# Altium PCB Control_Board.PcbDoc
Units mm, origin at the board's own origin, x right, y up, seen from the top; angles counter-clockwise.
Board outline 45 x 50 mm, 2 copper layers (Top Layer, Bottom Layer); 65 components, 68 nets, 264 pads, 144 vias.
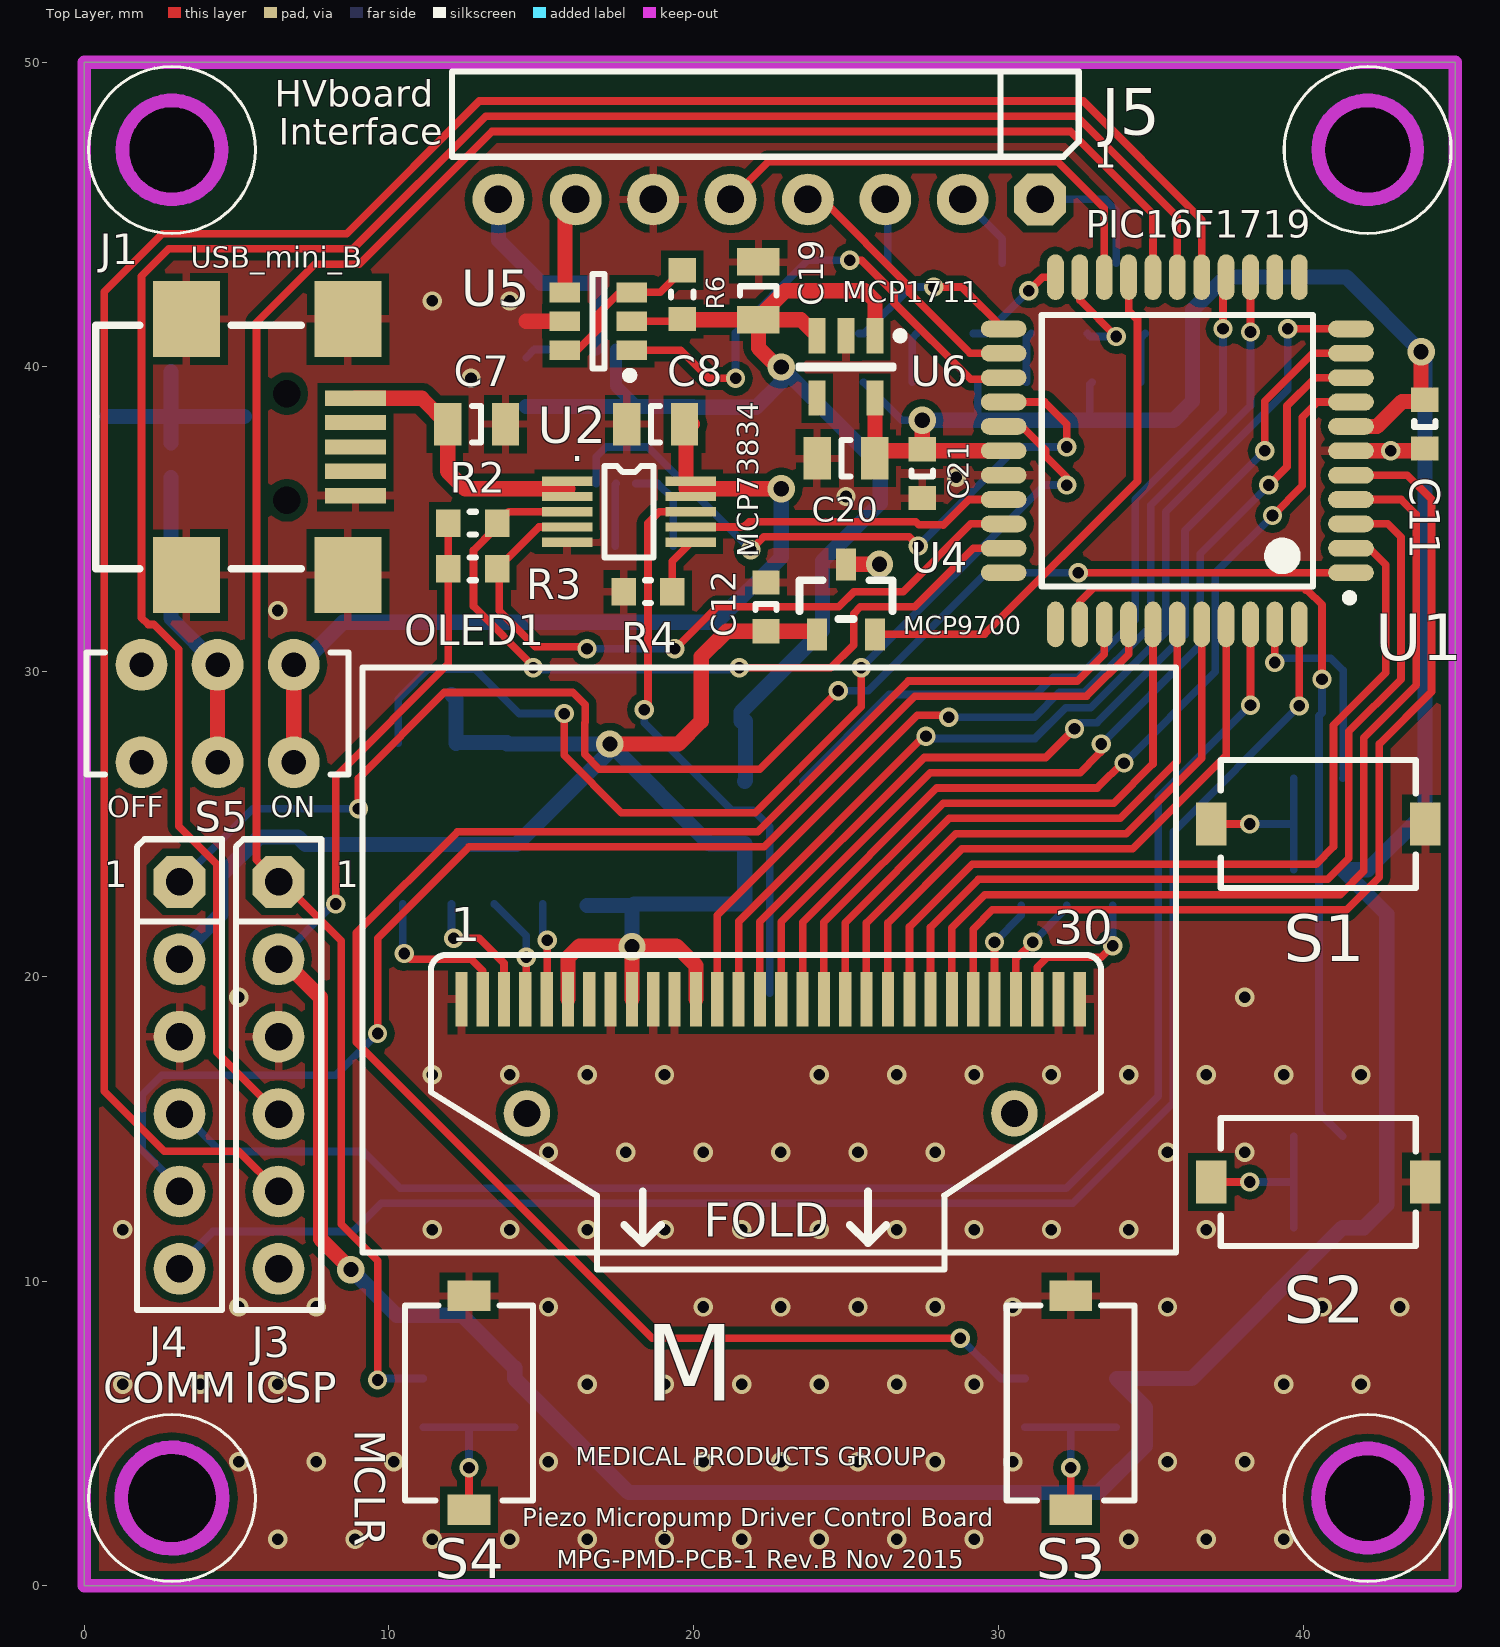
[diagram p0: Top Layer view]
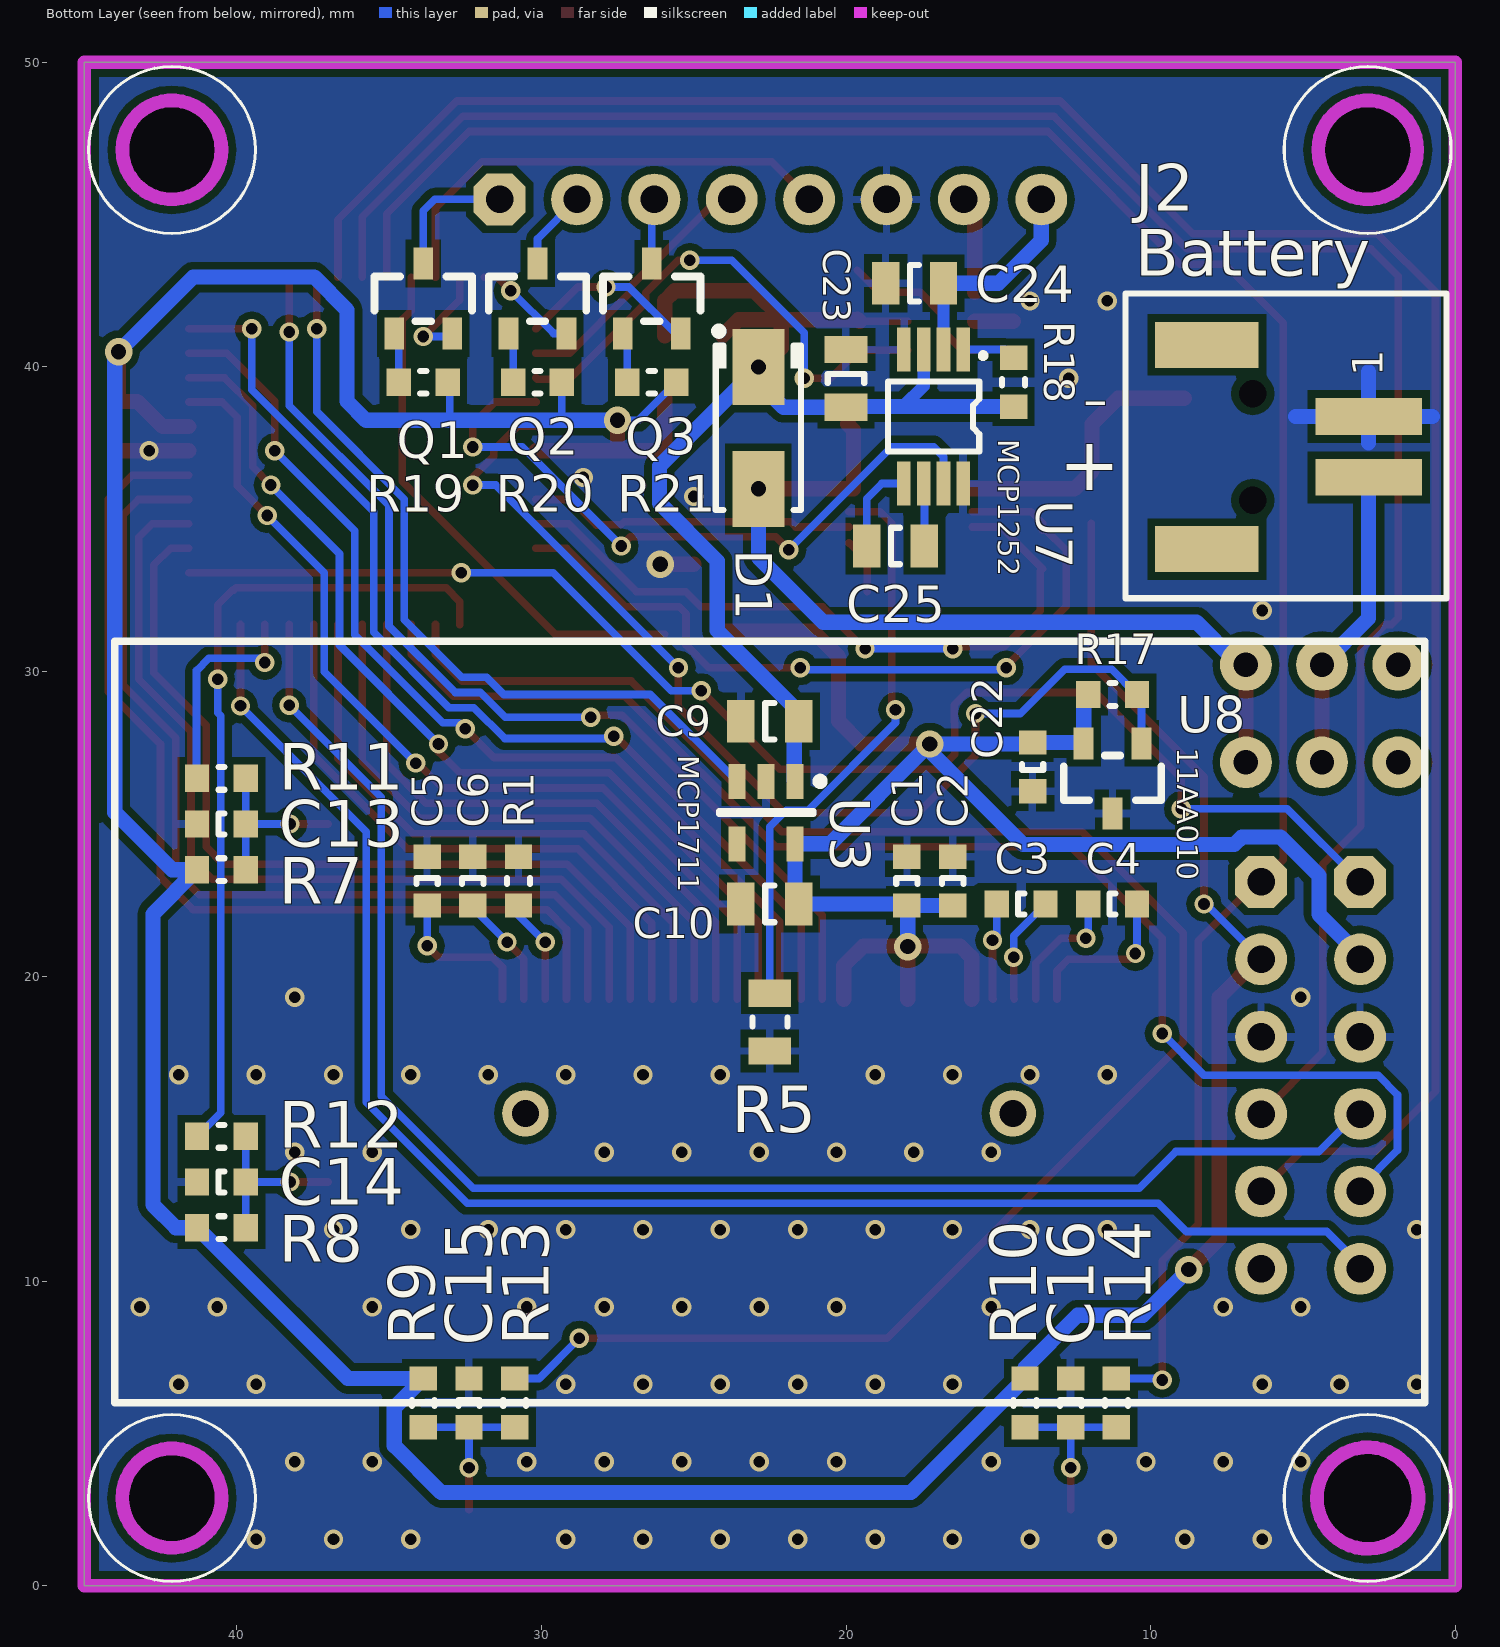
[diagram p1: Bottom Layer view, seen from below]
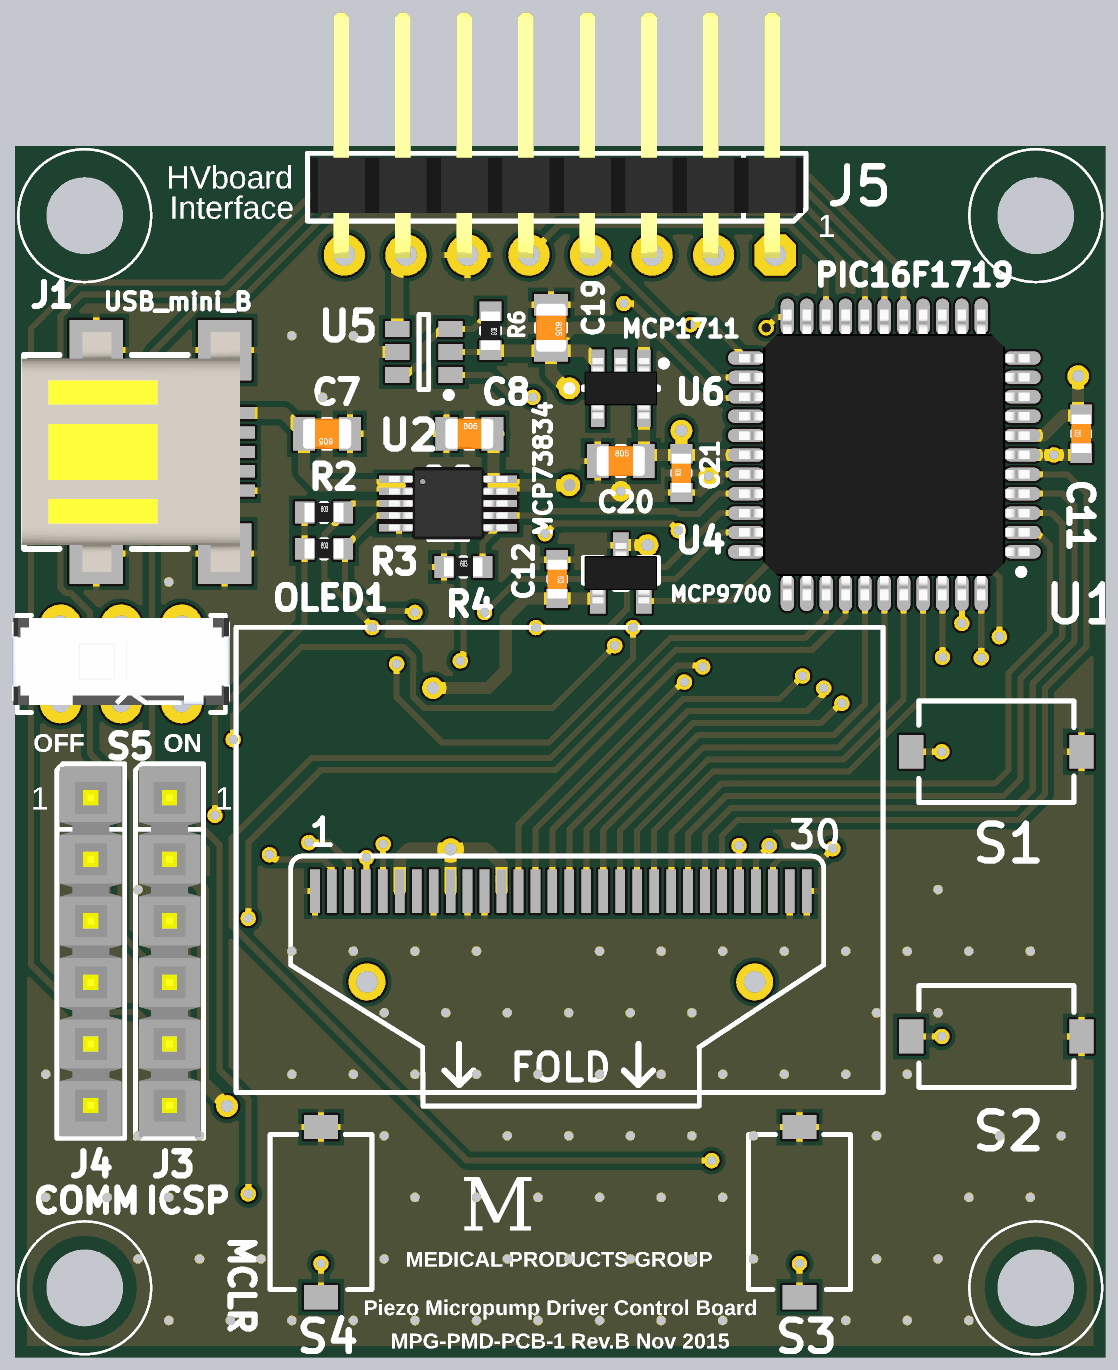
[diagram p2: 3D render of the assembled board from above, using the file's embedded part models]
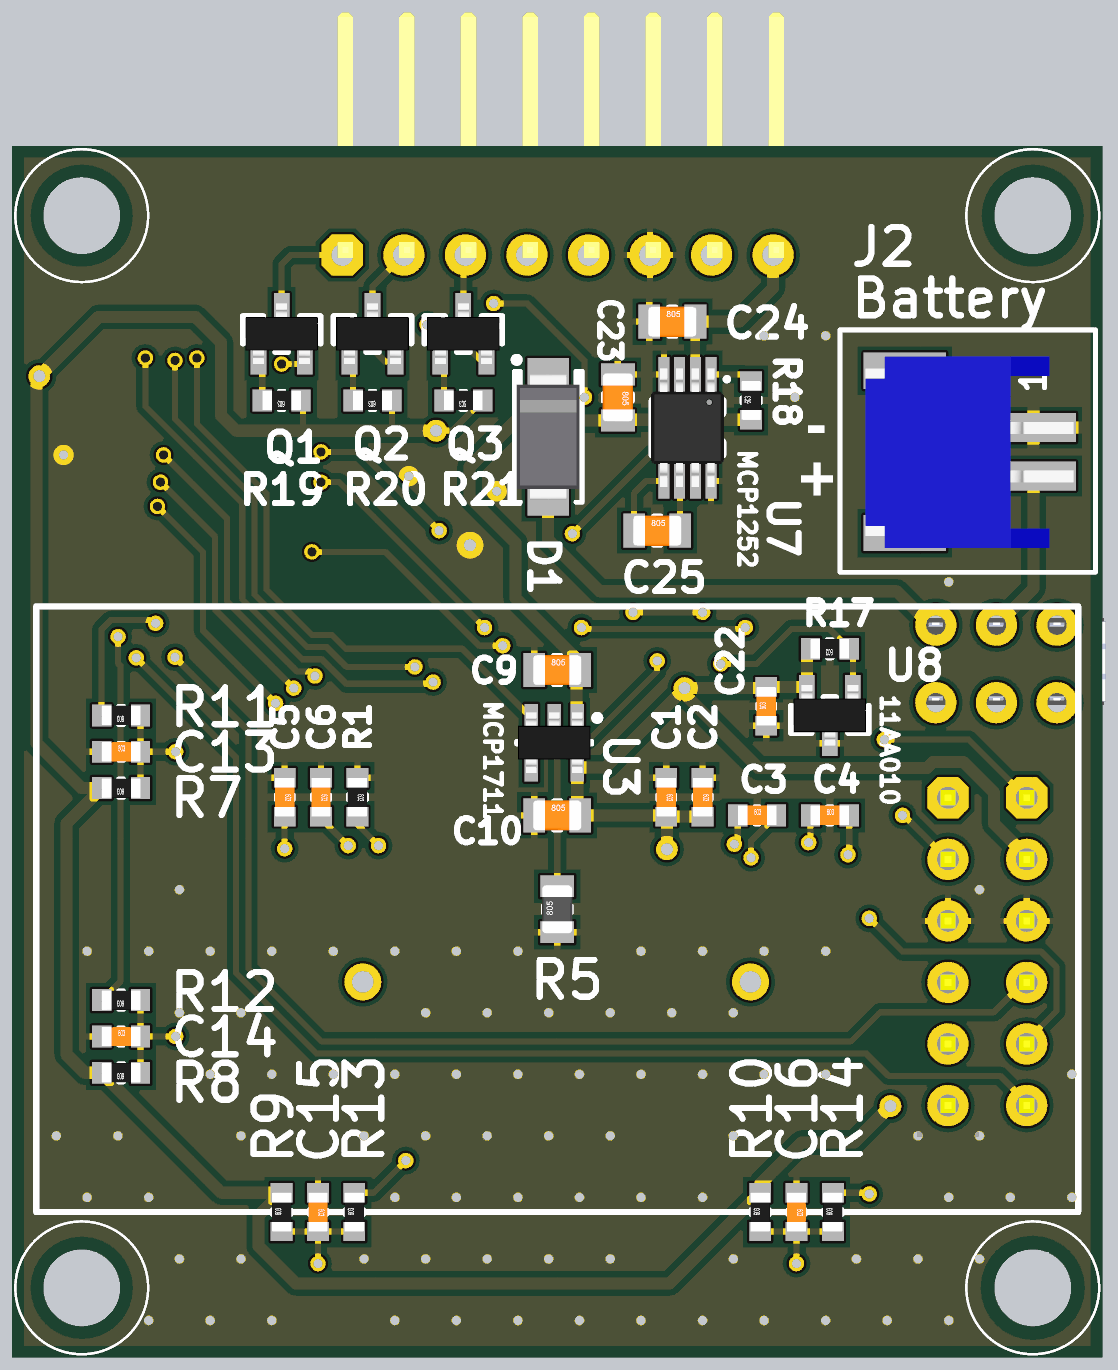
[diagram p3: 3D render of the assembled board from below, using the file's embedded part models]

## Layer stack, top to bottom
Top Solder: solder mask 0.0102, Solder Resist, Dk 3.5
Top Layer: signal copper 0.0356
Dielectric1: dielectric 0.32, FR-4, Dk 4.8
Bottom Layer: signal copper 0.0356
Bottom Solder: solder mask 0.0102, Solder Resist, Dk 3.5

## Board outline
0,0 0,50 45,50 45,0

## Design rules (kind name [scope] priority, off if disabled: settings)
Clearance [All] p1: gap=0.25 except(0.15: SMDPad-SMDPad)
FabricationTestPointUsage TestPointUsage [All] p1: valid=0 allowmultiple=FALSE
FabricationTestpoint Testpoint [All] p1: side=3 testpointundercomponent=TRUE minsize=1.016 maxsize=2.54 preferedsize=1.524 minholesize=0 maxholesize=1.016 preferedholesize=0.813 testpointgrid=0.025 allowsidetop=TRUE allowsidebottom=TRUE usegrid=TRUE gridtolerance=0
PolygonConnect PolygonConnect_3 [IsVia] p1: connectstyle=Direct reliefconductorwidth=0.254 reliefentries=4 polygonreliefangle="90 Angle" airgapwidth=0.254
PolygonConnect [All] p2: connectstyle=Relief reliefconductorwidth=0.254 reliefentries=4 polygonreliefangle="90 Angle" airgapwidth=0.254
RoomDefinition Control_Board [InComponentClass('Control_Board')] p1: confinementstyle=ConfineIn formatcopy=TRUE lockcomponents=FALSE outline 44.263,40.568 83.375,40.568 83.375,75.568 44.263,75.568
RoutingVias RoutingVias_Power [(InNet('+2.8V') OR InNet('+3.7V') OR InNet('+5.0V') OR InNet('VBAT') OR InNet('VDD') OR InNet('VUSB') OR InNet('GND'))] p1: holewidth=0.5 width=0.9 viastyle="Through Hole" minholewidth=0.5 minwidth=0.9 maxholewidth=0.5 maxwidth=0.9
RoutingVias [All] p2: holewidth=0.381 width=0.635 viastyle="Through Hole" minholewidth=0.381 minwidth=0.635 maxholewidth=0.381 maxwidth=0.635
SilkToSilkClearance [All] p1: silktosilkclearance=0.01
SilkToSolderMaskClearance SilkscreenOverComponentPads [IsPad] p1: minsilkscreentomaskgap=0.01 clearancetoexposedcopper=TRUE
SolderMaskExpansion [All] p1: expansion=0.102
Width Width_Power [(InNet('+2.8V') OR InNet('+3.7V') OR InNet('+5.0V') OR InNet('VBAT') OR InNet('VDD') OR InNet('VUSB') OR InNet('GND') OR InNet('+3.3V') OR InNet('+3.3V_MCU'))] p1: maxlimit=0.5 minlimit=0.25 preferedwidth=0.5
Width [All] p2: maxlimit=0.25 minlimit=0.25 preferedwidth=0.25
26 further rules are at their usual default settings.

## Components (designator, comment, footprint, x,y, rotation, side; value= is the part's Value field where it differs from the comment)
C1 "Capacitor NP" CAP_C_0603 18,23.125 r270 bottom
C2 "Capacitor NP" CAP_C_0603 16.5,23.125 r270 bottom
C3 "Capacitor NP" CAP_C_0603 14.25,22.375 r180 bottom
C4 "Capacitor NP" CAP_C_0603 11.25,22.375 r180 bottom
C5 "Capacitor NP" CAP_C_0603 33.75,23.125 r270 bottom
C6 "Capacitor NP" CAP_C_0603 32.25,23.125 r270 bottom
C7 "Capacitor NP" CAP_C_0805 12.875,38.125 r180 top
C8 "Capacitor NP" CAP_C_0805 18.75,38.125 r0 top
C9 "Capacitor NP" CAP_C_0805 22.5,28.375 r180 bottom
C10 "Capacitor NP" CAP_C_0805 22.5,22.375 r180 bottom
C11 "Capacitor NP" CAP_C_0603 44,38.125 r90 top
C12 "Capacitor NP" CAP_C_0603 22.375,32.125 r270 top
C13 "Capacitor NP" CAP_C_0603 40.5,25 r180 bottom
C14 "Capacitor NP" CAP_C_0603 40.5,13.25 r180 bottom
C15 "Capacitor NP" CAP_C_0603 32.375,6 r270 bottom
C16 "Capacitor NP" CAP_C_0603 12.625,6 r270 bottom
C19 "Capacitor NP" CAP_C_0805 22.125,42.5 r270 top
C20 "Capacitor NP" CAP_C_0805 25,37 r0 top
C21 "Capacitor NP" CAP_C_0603 27.5,36.5 r90 top
C22 "Capacitor NP" CAP_C_0603 13.875,26.875 r90 bottom
C23 "Capacitor NP" CAP_C_0805 20,39.625 r270 bottom
C24 "Capacitor NP" CAP_C_0805 17.75,42.75 r180 bottom
C25 "Capacitor NP" CAP_C_0805 18.375,34.125 r180 bottom
D1 "Diode Schottky" DO-214AC_SMA 22.875,38 r90 bottom
J1 "USB_mini_B" CON_USB-B_Mini_SMD_RA_HIR_UX60-MB-5ST 6.125,37.375 r270 top
J2 "Battery" HDR_M_2_1X2_SMD_RA 5.5,37.375 r270 bottom
J3 "ICSP" HDR_M_2.54_1x6 6.375,16.75 r270 top
J4 "COMM" HDR_M_2.54_1x6 3.125,16.75 r270 top
J5 "HVboard_Interface" HDR_M_2.54_1x8_RA 22.48,45.5 r180 top
OLED1 "OLED_2864HSWEG01" OLED_2864HSWEG01 22.525,19.25 r0 top
Q1 "Transistor NPN BEC" SOT-23-3 33.875,42.25 r180 bottom
Q2 "Transistor NPN BEC" SOT-23-3 30.125,42.25 r180 bottom
Q3 "Transistor NPN BEC" SOT-23-3 26.375,42.25 r180 bottom
R1 "Resistor" RES_C_0603 30.75,23.125 r270 bottom
R2 "Resistor" RES_C_0603 12.75,34.875 r0 top
R3 "Resistor" RES_C_0603 12.75,33.375 r0 top
R4 "Resistor" RES_C_0603 18.5,32.625 r0 top
R5 "10k" RES_C_0805 22.5,18.5 r90 bottom
R6 "Resistor" RES_C_0603 19.625,42.375 r270 top
R7 "Resistor" RES_C_0603 40.5,23.5 r0 bottom
R8 "Resistor" RES_C_0603 40.5,11.75 r0 bottom
R9 "Resistor" RES_C_0603 33.875,6 r90 bottom
R10 "Resistor" RES_C_0603 14.125,6 r90 bottom
R11 "Resistor" RES_C_0603 40.5,26.5 r0 bottom
R12 "Resistor" RES_C_0603 40.5,14.75 r0 bottom
R13 "Resistor" RES_C_0603 30.875,6 r90 bottom
R14 "Resistor" RES_C_0603 11.125,6 r90 bottom
R17 "Resistor" RES_C_0603 11.25,29.25 r0 bottom
R18 "Resistor" RES_C_0603 14.5,39.5 r90 bottom
R19 "Resistor" RES_C_0603 33.875,39.5 r0 bottom
R20 "Resistor" RES_C_0603 30.125,39.5 r0 bottom
R21 "Resistor" RES_C_0603 26.375,39.5 r0 bottom
S1 "Switch 2 Pin" SW_TACT_SMD_CK_KSR231GLFS 40.5,25 r90 top
S2 "Switch 2 Pin" SW_TACT_SMD_CK_KSR231GLFS 40.5,13.25 r90 top
S3 "Switch 2 Pin" SW_TACT_SMD_CK_KSR231GLFS 32.375,6 r180 top
S4 "MCLR" SW_TACT_SMD_CK_KSR231GLFS 12.625,6 r180 top
S5 "Switch 6 Pin SPDT" SW_SLIDE_TH_ESW_EG1271 4.375,28.625 r0 top
U1 "PIC16F1719" TQFP-44_10x10 35.875,37.25 r180 top
U2 "MCP73834" MSOP-10 17.875,35.25 r0 top
U3 "MCP1711" SOT-23-5 22.625,25.375 r0 bottom
U4 "MCP9700" SOT-23-3 25,32.375 r0 top
U5 "MOSFET N/P-CH 30V 26TSOT" TSOT26 16.875,41.5 r90 top
U6 "MCP1711" SOT-23-5 25,40 r180 top
U7 "MCP1252" MSOP-8 17.125,38.375 r270 bottom
U8 "11AA010" SOT-23-3 11.25,26.5 r0 bottom

## Footprints (in the part's own frame and the unit in brackets; to place one, negate y for a bottom-side part, rotate by r counter-clockwise, add the part's x,y. Pads: shape width x height; smd on the part's side, far side on the other; paste and mask are expansions set on the pad)
CAP_C_0603 [mm] "Chip Capacitor, 2-Leads, Body 1.6x0.8mm, IPC Medium Density"
  rect 0.8x0.9 smd: 1(-0.8,0) 2(0.8,0)
  silkscreen extent -0.1,-0.35 0.1,0.35, body extent -0.8,-0.4 0.8,0.4, height 0.3
CAP_C_0805 [mm] "Chip Capacitor, 2-Leads, Body 2.0x1.3mm, IPC Medium Density"
  rect 0.9x1.4 smd: 1(-0.95,0) 2(0.95,0)
  silkscreen extent -0.15,-0.6 0.15,0.6, body extent -1,-0.62 1,0.63, height 0.78
CON_USB-B_Mini_SMD_RA_HIR_UX60-MB-5ST [mm] "USB Mini B Metal Shield SMT R/A Type With Positioning Post"
  rect 2.5x2.2 smd: 0(-4.2,2.525) 0(-4.2,-2.775) 0(4.2,2.525) 0(4.2,-2.775)
  rect 0.5x2 smd: 1(-1.6,2.775) 2(-0.8,2.775) 3(0,2.775) 4(0.8,2.775) 5(1.6,2.775)
  round 0 hole 0.9 unplated: MH(-1.75,0.525) MH(1.75,0.525)
  silkscreen extent -4,-5.75 4,1, body extent -4.95,-5.85 4.95,3.15, height 4.6
DO-214AC_SMA [mm] "Molded Diode, 2-Leads, Body 5.0x2.7mm, IPC Medium Density"
  rect 2.5x1.7 smd: 1(-2,0) 2(2,0)
  silkscreen extent -2.7,-1.5 3.3,1.5, body extent -2.6,-1.3 2.6,1.3, height 2.4
HDR_M_2.54_1x6 [mm] "Header Male Vertical 6 Way 2.54mm Pitch"
  oct 1.7x1.7 hole 0.9: 1(-6.35,0)
  round 1.7 hole 0.9: 2(-3.81,0) 3(-1.27,0) 4(1.27,0) 5(3.81,0) 6(6.35,0)
  silkscreen extent -7.75,-1.4 7.7,1.4, body extent -7.62,-1.27 7.62,1.27, height 8.38
HDR_M_2.54_1x8_RA [mm] "Header Male Right Angle 8 Way 2.54mm Pitch"
  oct 1.7x1.7 hole 0.9: 1(-8.89,0)
  round 1.7 hole 0.9: 2(-6.35,0) 3(-3.81,0) 4(-1.27,0) 5(1.27,0) 6(3.81,0) 7(6.35,0) 8(8.89,0)
  silkscreen extent -10.16,-4.2 10.41,-1.4, body extent -10.03,-10.02 10.29,0.11, height 3.86
HDR_M_2_1X2_SMD_RA [mm] "CONN HEADER 2POS 2MM GOLD DIP"
  rect 1.2x3.5 smd: 1(-1,2.654)
  rrect0% 1.2x3.5 smd: 2(1,2.654)
  rect 1.5x3.4 smd: ""(-3.35,-2.654) ""(3.35,-2.654)
  silkscreen extent -5.04,-5.33 4.96,5.21, body extent -3.94,-4.28 3.96,4.32, height 5.3
MSOP-8 [mm] "MSOP, 8-Leads, Body 4.9.0x3.0mm (max), Pitch 0.65mm, IPC Medium Density"
  rect 1.45x0.45 smd: 1(-2.2,0.975) 2(-2.2,0.325) 3(-2.2,-0.325) 4(-2.2,-0.975) 5(2.2,-0.975) 6(2.2,-0.325) 7(2.2,0.325) 8(2.2,0.975)
  silkscreen extent -2.05,-1.5 1.15,1.67, body extent -2.45,-1.5 2.45,1.5, height 1.15
MSOP-10 [mm] "MSSOP, 10-Leads, Body 3.0x3.0mm (max), Pitch 0.50mm, IPC Medium Density"
  rect 1.65x0.3 smd: 1(-2.025,1) 2(-2.025,0.5) 3(-2.025,0) 4(-2.025,-0.5) 5(-2.025,-1) 6(2.025,-1) 7(2.025,-0.5) 8(2.025,0) 9(2.025,0.5) 10(2.025,1)
  silkscreen extent -0.8,-1.5 0.8,1.5, body extent -2.45,-1.5 2.45,1.5, height 1.15
OLED_2864HSWEG01 [mm]
  rect 0.4x1.8 smd: 1(-10.15,0) 2(-9.45,0) 3(-8.75,0) 4(-8.05,0) 5(-7.35,0) 6(-6.65,0) 7(-5.95,0) 8(-5.25,0) 9(-4.55,0) 10(-3.85,0) 11(-3.15,0) 12(-2.45,0) 13(-1.75,0) 14(-1.05,0) 15(-0.35,0) 16(0.35,0) 17(1.05,0) 18(1.75,0) 19(2.45,0) 20(3.15,0) 21(3.85,0) 22(4.56,0) 23(5.25,0) 24(5.95,0) 25(6.65,0) 26(7.35,0) 27(8.05,0) 28(8.75,0) 29(9.45,0) 30(10.15,0)
  round 1.524 hole 0.889: MH(-8,-3.75) MH(8,-3.75)
  silkscreen extent -13.4,-8.88 13.3,10.89, body extent -13.45,-8.25 13.34,10.92, height 1.52
RES_C_0603 [mm] "Chip Resistor, 2-Leads, Body 1.6x0.8mm, IPC Medium Density"
  rect 0.8x0.9 smd: 1(-0.8,0) 2(0.8,0)
  silkscreen extent -0.1,-0.38 0.1,0.38, body extent -0.8,-0.4 0.8,0.4, height 0.3
RES_C_0805 [mm] "Chip Resistor, 2-Leads, Body 2.0x1.3mm, IPC Medium Density"
  rect 0.9x1.4 smd: 1(-0.95,0) 2(0.95,0)
  silkscreen extent -0.15,-0.58 0.15,0.58, body extent -1,-0.63 1,0.63, height 0.78
SOT-23-3 [mm]
  rect 0.65x1.05 smd: 1(-0.95,-1.15) 2(0.95,-1.15) 3(0,1.15)
  silkscreen extent -1.6,-0.75 1.6,0.72, body extent -1.5,-1.25 1.5,1.25, height 1.09
SOT-23-5 [mm] "SOT-23-5"
  rect 0.55x1.15 smd: 1(-0.95,-1.025) 2(0,-1.025) 3(0.95,-1.025) 4(0.95,1.025) 5(-0.95,1.025)
  silkscreen extent -1.9,-1.15 1.55,0.05, body extent -1.5,-1.25 1.5,1.25, height 1.08
SW_SLIDE_TH_ESW_EG1271 [mm] "E-Switch EG1271"
  round 1.7 hole 0.8: 1(-2.5,1.6) 2(0,1.6) 3(2.5,1.6) 4(-2.5,-1.6) 5(0,-1.6) 6(2.5,-1.6)
  silkscreen extent -4.3,-2 4.3,2, body extent -4.5,-1.75 4.5,1.9, height 5.5
SW_TACT_SMD_CK_KSR231GLFS [mm]
  rect 1.4x1 smd: 1(0,-3.51) 2(0,3.51)
  silkscreen extent -2.1,-3.2 2.1,3.2, body extent -1.91,-3.8 1.92,3.81, height 4.5
TQFP-44_10x10 [mm] "TQFP, 44-Leads, Body 10x10mm (max), Pitch 0.80mm, IPC Medium Density"
  oval 1.5x0.55 smd: 1(-5.7,4) 2(-5.7,3.2) 3(-5.7,2.4) 4(-5.7,1.6) 5(-5.7,0.8) 6(-5.7,0) 7(-5.7,-0.8) 8(-5.7,-1.6) 9(-5.7,-2.4) 10(-5.7,-3.2) 11(-5.7,-4) 23(5.7,-4) 24(5.7,-3.2) 25(5.7,-2.4) 26(5.7,-1.6) 27(5.7,-0.8) 28(5.7,0) 29(5.7,0.8) 30(5.7,1.6) 31(5.7,2.4) 32(5.7,3.2) 33(5.7,4)
  oval 0.55x1.5 smd: 12(-4,-5.7) 13(-3.2,-5.7) 14(-2.4,-5.7) 15(-1.6,-5.7) 16(-0.8,-5.7) 17(0,-5.7) 18(0.8,-5.7) 19(1.6,-5.7) 20(2.4,-5.7) 21(3.2,-5.7) 22(4,-5.7) 34(4,5.7) 35(3.2,5.7) 36(2.4,5.7) 37(1.6,5.7) 38(0.8,5.7) 39(0,5.7) 40(-0.8,5.7) 41(-1.6,5.7) 42(-2.4,5.7) 43(-3.2,5.7) 44(-4,5.7)
  silkscreen extent -5.78,-4.45 4.45,4.95, body extent -6,-6 6,6, height 1.05
TSOT26 [mm] "TSOT26 - 6PIN"
  rect 0.65x1 smd: 1(-0.95,-1.1) 2(0,-1.1) 3(0.95,-1.1) 4(0.95,1.1) 5(0,1.1) 6(-0.95,1.1)
  silkscreen extent -1.9,-1.15 1.55,0.2

## Part data
C1 C2 C3 C4: library part CAP0517, "Capacitor"
C5 C6: library part CAP0597, "Capacitor"
C7 C8: library part CAP0419, "Capacitor"
C9 C10 C19 C20 C25: library part CAP1211, "Capacitor"
C11 C12 C13 C14 C15 C16 C21 C22: library part CAP0011, "Capacitor"
C23 C24: library part CAP1148, "Capacitor"
D1: library part DIODE0128
J1: library part CON0276, "Connector USB"
J2: library part CON1434
J3 J4: library part CON1106
J5: library part CON1290
OLED1: library part LCD0034
Q1 Q2 Q3: library part TRA0039, "Transistor Bipolar"
R1: library part RSMT0758
R2 R3: library part RES1130
R4: library part RSMT0138
R5: library part RES1425
R6: library part RSMT1115
R7 R8 R9 R10: library part RSMT0139
R11 R12 R13 R14: library part RSMT0518
R17 R19 R20 R21: library part RSMT0309
R18: library part RES1066
S1 S2 S3 S4: library part SWITCH1040, "Switch"
S5: library part SWITCH0051, "Switch, Slide, SPDT, TH"
U1: library part MIC6241, "PIC16F"
U2: library part MIC3178, "MCP738XX"
U3 U6: library part MIC6434, "LDO MCP1711"
U4: library part MIC0740, "MCP97XX"
U5: library part "MOSFET N/P-CH 30V"
U7: library part MIC6473, "Low-Noise, Positive-Regulated Charge Pump"
U8: "IC EEPROM 1KBIT 100KHZ SOT23-3"

## Free pads (board coordinates)
  round 0.762 hole 3.175 unplated: 0(2.875,2.875) 0(2.875,47.125) 1(42.125,2.875) 1(42.125,47.125)

## Via types
v1: diameter 0.635, hole 0.381, Top Layer to Bottom Layer, tented both sides, 84 vias
v2: diameter 0.635, hole 0.381, Top Layer to Bottom Layer, 52 vias
v3: diameter 0.9, hole 0.5, Top Layer to Bottom Layer, 8 vias

## Nets (pads, with @x,y where several pads share a name; then routed paths per layer and width w, separated by ;. In a path a pad name is that pad's centre, name@x,y a point inside that pad or via, vN(x,y) a via of type N, cw(c..) or ccw(c..) an arc to the next point about the centre after c; other vN are vias at no path point)
+3.3V: C1.2 C2.2 C10.2 C12.2 C22.2 J4.2 OLED1.6 OLED1.9 OLED1.12 R17.2 U3.5 U4.1 U8.2 | length 57.6
  Top Layer w0.25: U4.1@24.025,31.325 U4.1@24.05,31.35
  Top Layer w0.5: OLED1.6 15.875,20.625 16.25,21 19.432,21 20.075,20.357 OLED1.12 ; v3(17.25,27.625) 19.5,27.625 20.25,28.375 20.25,30.5 21.075,31.325 C12.2 U4.1@24.025,31.325 ; OLED1.9 v3(17.975,20.975)
  Bottom Layer w0.5: J4.2@3.125,20.685 4.475,22.035 4.475,23.307 5.743,24.575 7.007,24.575 7.257,24.325 14.182,24.325 17.25,27.393 v3(17.25,27.625) ; R17.2 12.2,29.1 U8.2 12.225,27.675 C22.2 ; C22.2@13.875,27.625 v3(17.25,27.625) ; C2.2 C1.2 ; v3(17.975,20.975) 17.975,22.3 C1.2 ; v3(17.25,27.625) 20.525,24.35 U3.5 21.675,22.4 21.7,22.375 C10.2 18.05,22.375 C1.2
+3.3V_MCU: C11.2 C20.2 C21.2 J3.2 R2.1 R3.1 R7.2 R8.2 R9.2 R10.2 R19.1 R20.1 R21.1 U1.7 U1.28 U6.5 | length 139.7
  Top Layer w0.25: v2(8.25,22.375) 8.25,26.555 11.95,30.255 R3.1 R2.1 ; C21.2@27.5,37.25 C21.2 ; C11.2@43.947,38.872 C11.2
  Top Layer w0.5: J3.2@6.438,20.622 7.75,19.31 7.75,11.375 v3(8.75,10.375) ; U6.5 C20.2 26.2,37.25 27.5,37.25 U1.28 ; C21.2@27.5,37.3 v3(27.5,38.25) ; U1.7 42.431,38.05 43.253,38.872 C11.2@43.875,38.872 ; v3(43.875,40.5) 43.875,38.944 C11.2@43.947,38.872
  Bottom Layer w0.25: J3.2 v2@8.19,22.375 ; J3.2@6.375,20.685 J3.2@6.44,20.685 ; R21.1 26.825,38.25 v3(27.5,38.25) ; 29.25,38.25 29.325,38.325 R20.1 ; 33,38.25 33,39.425 R19.1
  Bottom Layer w0.5: v2@8.19,22.375 v2(8.25,22.375) ; v3(8.75,10.375) 10.25,8.875 12.4,8.875 14.125,7.15 R10.2 17.867,3.058 33.29,3.058 34.825,4.593 34.825,5.85 R9.2 36.35,6.8 R8.2 42,11.75 42.75,12.5 42.75,22.05 R7.2 42.125,23.5 44,25.375 44,40.375 v3(43.875,40.5) 41.425,42.95 37.45,42.95 36.375,41.875 36.375,38.875 35.75,38.25 33,38.25 29.25,38.25 v3(27.5,38.25)
+3.7V: J5.7 U5.4 | length 3.2
  Top Layer w0.5: U5.4 15.775,45.145 J5.7
  Bottom Layer w0.5: J5.7@16.1,45.47 J5.7
+5.0V: C24.2 J5.8 U7.2 | length 7.3
  Bottom Layer w0.4: U7.2 C24.2
  Bottom Layer w0.5: J5.8 13.59,44.16 15,42.75 C24.2
GND: C1.1 C2.1 C5.1 C6.1 C7.1 C8.1 C9.1 C10.1 C11.1 C12.1 C13.1 C14.1 C15.1 C16.1 C19.1 C20.1 C21.1 C22.1 C23.1 C24.1 J1.0 J1.5 J2.1 J3.3 J4.3 J5.6 OLED1.1 OLED1.8 OLED1.10 OLED1.11 OLED1.29 OLED1.30 R1.1 R4.1 R5.1 S1.1 S2.1 S3.1 S4.1 U1.6 U1.29 U2.5 U3.2 U4.3 U5.5 U6.2 U7.4 U7.8 U8.3 | length 11.7
  Top Layer w0.5: 14.5,41.5 U5.5 ; U4.3 v3(26.1,33.525) ; U1.6 v2(42.875,37.25) 43.925,37.25 C11.1
  Bottom Layer w0.5: 0.75,38.375 J2.1 ; 2.846,37.504 J2.1 ; 2.846,39.846 J2.1 ; 5.25,38.375 J2.1
  other v1: 6.343,1.528 8.883,1.528 11.423,1.528 13.963,1.528 16.503,1.528 19.043,1.528 21.583,1.528 24.123,1.528 26.663,1.528 29.203,1.528 34.283,1.528 36.823,1.528 39.363,1.528 5.073,4.068 7.613,4.068 10.153,4.068 15.233,4.068 20.313,4.068 22.853,4.068 25.393,4.068 27.933,4.068 30.473,4.068 35.553,4.068 38.093,4.068 1.263,6.608 3.803,6.608 6.343,6.608 16.503,6.608 19.043,6.608 21.583,6.608 24.123,6.608 26.663,6.608 29.203,6.608 39.363,6.608 41.903,6.608 5.073,9.148 7.613,9.148 15.233,9.148 20.313,9.148 22.853,9.148 25.393,9.148 27.933,9.148 30.473,9.148 35.553,9.148 40.633,9.148 43.173,9.148 1.263,11.688 11.423,11.688 13.963,11.688 16.503,11.688 19.043,11.688 21.583,11.688 24.123,11.688 26.663,11.688 29.203,11.688 31.743,11.688 34.283,11.688 36.823,11.688 15.233,14.228 17.773,14.228 20.313,14.228 22.853,14.228 25.393,14.228 27.933,14.228 35.553,14.228 38.093,14.228 11.423,16.768 13.963,16.768 16.503,16.768 19.043,16.768 24.123,16.768 26.663,16.768 29.203,16.768 31.743,16.768 34.283,16.768 36.823,16.768 39.363,16.768 41.903,16.768 5.073,19.308 38.093,19.308 6.343,32.008 12.693,39.628 11.423,42.168 13.963,42.168
  other v2: 25,35.75 28.625,36.375
NetC3_1: C3.1 OLED1.5 | length 3.2
  Top Layer w0.25: OLED1.5 15.192,19.268 v2(15.192,21.184)
  Bottom Layer w0.25: C3.1 15.05,21.327 v2(15.192,21.184)
NetC3_2: C3.2 OLED1.4 | length 3.6
  Top Layer w0.25: OLED1.4 14.5,19.275 v2(14.5,20.625)
  Bottom Layer w0.25: C3.2 14.5,21.325 v2(14.5,20.625)
NetC4_1: C4.1 OLED1.3 | length 4.3
  Top Layer w0.25: v2(12.125,21.25) 12.957,21.25 13.775,20.432 OLED1.3
  Bottom Layer w0.25: C4.1 12.05,21.325 v2(12.125,21.25)
NetC4_2: C4.2 OLED1.2 | length 5.4
  Top Layer w0.25: v2(10.5,20.75) 10.693,20.557 12.698,20.557 13.075,20.18 OLED1.2
  Bottom Layer w0.25: C4.2 10.45,20.8 v2(10.5,20.75)
NetC5_2: C5.2 OLED1.28 | length 5.1
  Top Layer w0.25: OLED1.28 31.275,20.296 31.604,20.625 33.375,20.625 v2(33.75,21)
  Bottom Layer w0.25: v2(33.75,21) C5.2
NetC6_2: C6.2 OLED1.27 | length 3.8
  Top Layer w0.25: OLED1.27 30.575,20.575 v2(31.125,21.125)
  Bottom Layer w0.25: v2(31.125,21.125) 32.25,22.25 C6.2
NetC7_2: C7.2 J1.1 U2.1 U2.2 | length 9.1
  Top Layer w0.5: J1.1 11.075,38.975 C7.2 11.925,36.575 12.5,36 15.875,36
NetC8_2: C8.2 D1.1 S5.3 S5.6 U2.9 U2.10 | length 28.3
  Top Layer w0.5: S5.6 S5.3 S5.3@6.875,30.35 ; C8.2@19.95,38.125 19.75,37.925 19.75,36 v3(22.875,36)
  Bottom Layer w0.5: S5.3@6.875,30.35 7.225,30.35 8.5,31.625 20.75,31.625 22.875,33.75 v3(22.875,36)
NetC13_2: C13.2 R7.1 R11.1 S1.2 | length 5.7
  Top Layer w0.25: S1.2 v2(38.25,25)
  Bottom Layer w0.25: v2(38.25,25) C13.2 ; R7.1 C13.2 ; R11.1 C13.2
NetC14_2: C14.2 R8.1 R12.1 S2.2 | length 5.7
  Top Layer w0.25: S2.2 v2(38.25,13.25)
  Bottom Layer w0.25: v2(38.25,13.25) C14.2 ; R8.1 C14.2 ; R12.1 C14.2
NetC15_2: C15.2 R9.1 R13.1 S3.2 | length 5.7
  Top Layer w0.25: S3.2 v2(32.375,3.875)
  Bottom Layer w0.25: R13.1 C15.2 ; v2(32.375,3.875) C15.2 ; R9.1 C15.2
NetC16_2: C16.2 R10.1 R14.1 S4.2 | length 5.7
  Top Layer w0.25: S4.2 v2(12.625,3.875)
  Bottom Layer w0.25: R14.1 R10.1 ; v2(12.625,3.875) C16.2
NetC25_1: C25.1 U7.5 | length 3
  Bottom Layer w0.25: U7.5 18.825,36.175 19.325,35.675 C25.1
NetC25_2: C25.2 U7.6 | length 2.1
  Bottom Layer w0.25: C25.2 17.425,36.15 U7.6
NetJ2_2: J2.2 S5.2 S5.5 | length 10
  Top Layer w0.5: S5.5 S5.2
  Bottom Layer w0.5: J2.2 2.846,31.754 S5.2
NetJ3_1: J3.1 R14.2 U1.18 | length 73.2
  Top Layer w0.25: v2(9.625,6.75) 9.625,10.667 8.433,11.859 8.433,21.167 6.5,23.1 J3.1 5.65,23.825 5.65,41.455 7.57,43.375 9.025,43.375 13.381,47.731 32.367,47.731 35.075,45.023 U1.18
  Bottom Layer w0.25: v2(9.625,6.75) 9.675,6.8 R14.2
NetJ3_4: J3.4 U1.17 | length 69
  Top Layer w0.25: J3.4 4.35,17.505 4.35,23.68 3.1,24.93 3.1,30.732 2.282,31.55 2.095,31.55 1.875,31.77 1.875,42.98 2.77,43.875 8.818,43.875 13.174,48.231 32.574,48.231 35.875,44.93 U1.17
NetJ3_5: J3.5 U1.16 | length 75.4
  Top Layer w0.25: J3.5 5.06,14.255 2.618,14.255 0.65,16.223 0.65,42.462 2.563,44.375 8.611,44.375 12.967,48.731 32.781,48.731 36.675,44.837 U1.16
NetJ4_1: J4.1 U1.1 | length 46.3
  Top Layer w0.25: v2(9,25.5) 9,26.5 11.817,29.318 16.037,29.318 16.442,28.912 16.442,28.338 16.425,28.321 16.425,27.283 16.908,26.8 22.175,26.8 v2(24.75,29.375) ; v2(32.625,33.25) U1.1
  Bottom Layer w0.25: J4.1 5.525,25.5 v2(9,25.5) ; v2(24.75,29.375) 25.73,29.375 29.604,33.25 v2(32.625,33.25)
NetJ4_4: J4.4 U1.42 | length 51.2
  Top Layer w0.25: v2(38.275,28.9) U1.42
  Bottom Layer w0.25: J4.4@3.125,15.605 4.48,14.25 9.175,14.25 10.375,13.05 32.23,13.05 35.25,16.07 35.25,25.875 v2(38.275,28.9)
NetJ4_5: J4.5 U1.37 | length 44.7
  Top Layer w0.25: v2(9.625,18.125) 9.625,21.248 12.627,24.25 22.314,24.25 27.256,29.193 32.893,29.193 34.275,30.575 U1.37
  Bottom Layer w0.25: J4.5@3.125,13.065 1.9,14.29 1.9,16.112 2.538,16.75 8.25,16.75 v2(9.625,18.125)
NetJ4_6: J4.6 U1.44 | length 52.2
  Top Layer w0.25: v2(39.875,28.875) U1.44
  Bottom Layer w0.25: J4.6@3.125,10.525 4.225,11.625 8.825,11.625 9.75,12.55 32.437,12.55 35.75,15.863 35.75,24.75 v2(39.875,28.875)
NetJ5_1: J5.1 Q1.3 | length 4.4
  Bottom Layer w0.25: J5.1 33.5,45.5 33.875,45.125 Q1.3
NetJ5_2: J5.2 Q2.3 | length 3.1
  Top Layer w0.254: J5.2 J5.2@29.325,45.5
  Bottom Layer w0.25: J5.2 30.125,44.205 Q2.3
NetJ5_3: J5.3 Q3.3 | length 2.3
  Top Layer w0.25: J5.3 J5.3@26.499,45.5
  Bottom Layer w0.25: J5.3 26.375,45.415 Q3.3
NetJ5_4: J5.4 U1.24 | length 8.6
  Top Layer w0.25: J5.4 24.216,45.5 27.075,42.641 27.075,42.446 29.071,40.45 U1.24
NetJ5_5: J5.5 U1.20 | length 15.7
  Top Layer w0.25: J5.5 22.441,46.731 31.953,46.731 33.475,45.209 U1.20
NetOLED1_13: OLED1.13 U1.14 | length 33.8
  Top Layer w0.25: OLED1.13 20.775,22.004 27.339,28.568 v2@28.375,28.568 ; v2(38.275,41.15) U1.14
  Bottom Layer w0.25: v2(28.375,28.5) 31.188,28.5 32.006,29.318 32.823,29.318 35,31.495 35,35.457 38.275,38.732 v2(38.275,41.15)
NetOLED1_14: OLED1.14 U1.11 | length 34.2
  Top Layer w0.25: OLED1.14 21.475,21.8 v2@27.588,27.912 ; v2(39.5,41.25) U1.11
  Bottom Layer w0.25: v2(27.625,27.875) 27.692,27.807 31.203,27.807 32.213,28.818 33.03,28.818 35.5,31.288 35.5,35.25 39.5,39.25 v2(39.5,41.25)
NetOLED1_15: OLED1.15 U1.10 | length 32.6
  Top Layer w0.25: OLED1.15 22.175,21.793 27.565,27.182 31.557,27.182 v2(32.5,28.125) ; v2(38.75,37.25) 38.75,38.875 40.325,40.45 U1.10
  Bottom Layer w0.25: v2(32.5,28.125) 32.693,28.318 33.237,28.318 36.125,31.205 36.125,34.625 v2(38.75,37.25)
NetOLED1_16: OLED1.16 U1.9 | length 31.7
  Top Layer w0.25: OLED1.16 22.875,21.786 27.772,26.682 32.682,26.682 33.25,27.25 33.375,27.375 v2(33.375,27.625) ; v2(38.875,36.125) 39.475,36.725 39.475,38.725 40.4,39.65 U1.9
  Bottom Layer w0.25: v2(33.375,27.625) 36.625,30.875 36.625,33.875 v2(38.875,36.125)
NetOLED1_17: OLED1.17 U1.8 | length 31.1
  Top Layer w0.25: OLED1.17 23.575,21.778 27.979,26.183 33.253,26.183 v2@34.125,27.055 ; v2(34.125,27) v2@34.125,27.055 ; v2@34.125,27.056 34.195,27.125 v2@34.125,27.055 ; v2(39,35.125) 39.975,36.1 39.975,38.35 40.475,38.85 U1.8
  Bottom Layer w0.25: v2(34.125,27) 37.125,30 37.125,33.25 v2(39,35.125)
NetOLED1_18: OLED1.18 U1.38 | length 20.1
  Top Layer w0.25: OLED1.18 24.275,21.771 28.186,25.683 33.787,25.683 35.075,26.971 U1.38
NetOLED1_19: OLED1.19 U1.39 | length 20.1
  Top Layer w0.25: OLED1.19 24.975,21.764 28.393,25.183 33.994,25.183 35.875,27.063 U1.39
NetOLED1_20: OLED1.20 U1.40 | length 20.1
  Top Layer w0.25: OLED1.20 25.668,19.257 25.668,21.75 28.6,24.683 34.201,24.683 36.675,27.156 U1.40
NetOLED1_21: OLED1.21 U1.41 | length 20.2
  Top Layer w0.25: OLED1.21 26.375,21.75 28.808,24.183 34.408,24.183 37.475,27.249 U1.41
NetOLED1_22: OLED1.22 U1.2 | length 28.7
  Top Layer w0.25: OLED1.22 27.085,21.624 29.143,23.683 40.433,23.683 41,24.25 41,28.246 42.718,29.964 42.718,33.502 42.169,34.05 U1.2
NetOLED1_23: OLED1.23 U1.3 | length 30.1
  Top Layer w0.25: OLED1.23 27.775,21.607 29.35,23.183 40.808,23.183 41.5,23.875 41.5,28.039 43.218,29.757 43.218,34.408 42.775,34.85 U1.3
NetOLED1_24: OLED1.24 U1.4 | length 31.4
  Top Layer w0.25: OLED1.24 28.475,21.6 29.558,22.683 41.225,22.683 42,23.457 42,27.832 43.717,29.55 43.717,35.158 43.225,35.65 U1.4
NetOLED1_25: OLED1.25 U1.5 | length 32.4
  Top Layer w0.25: OLED1.25 29.175,21.55 29.808,22.183 41.433,22.183 42.5,23.25 42.5,27.625 44.217,29.342 44.217,35.658 43.425,36.45 U1.5
NetOLED1_26: OLED1.26 R1.2 | length 3.4
  Top Layer w0.25: OLED1.26 v2(29.875,21.125)
  Bottom Layer w0.25: v2(29.875,21.125) 30.75,22 R1.2
NetQ1_1: Q1.1 R19.2 | length 1.7
  Bottom Layer w0.25: R19.2 34.675,40.95 Q1.1
NetQ1_2: Q1.2 U1.21 | length 3.4
  Top Layer w0.25: U1.21 32.675,42.2 v2(33.875,41)
  Bottom Layer w0.25: Q1.2 33.025,41 v2(33.875,41)
NetQ2_1: Q2.1 R20.2 | length 1.7
  Bottom Layer w0.25: R20.2 30.925,40.95 Q2.1
NetQ2_2: Q2.2 U1.22 | length 3.5
  Top Layer w0.25: v2(31,42.5) 31.45,42.95 U1.22
  Bottom Layer w0.25: Q2.2 29.6,41.1 v2(31,42.5)
NetQ3_1: Q3.1 R21.2 | length 1.7
  Bottom Layer w0.25: R21.2 27.175,40.95 Q3.1
NetQ3_2: Q3.2 U1.23 | length 6
  Top Layer w0.25: v2(27.875,42.625) 28.8,42.625 U1.23
  Bottom Layer w0.25: Q3.2 25.6,41.1 27.125,42.625 v2(27.875,42.625)
NetR2_2: R2.2 U1.32 U2.3 | length 26.1
  Top Layer w0.25: v2@14.766,30.151 12.775,32.143 12.775,33.98 13.445,34.65 13.55,34.65 R2.2 13.925,35.25 U2.3 ; v2(21.5,30.125) 24.5,30.125 25.25,30.875 25.25,31.905 25.47,32.125 27.25,32.125 29.175,34.05 U1.32
  Bottom Layer w0.25: v2(14.74,30.125) 14.807,30.058 21.433,30.058 v2(21.5,30.125)
NetR3_2: R3.2 U1.31 U2.4 | length 23.1
  Top Layer w0.25: U2.4 14.925,34.75 R3.2 13.625,33.3 13.625,32 14.807,30.817 16.433,30.817 v2(16.5,30.75) ; v2(19.375,30.75) 19.375,30.728 19.386,30.739 20.772,32.125 24.763,32.125 25.263,32.625 26.875,32.625 29.1,34.85 U1.31
  Bottom Layer w0.25: v2(16.5,30.75) v2(19.375,30.75)
NetR4_2: R4.2 U2.6 | length 1.8
  Top Layer w0.25: R4.2 19.3,33.625 U2.6@19.9,34.225
NetR5_2: R5.2 U2.8 | length 19.2
  Top Layer w0.25: v2(18.375,28.75) 18.5,28.875 18.5,34.875 18.875,35.25 U2.8
  Bottom Layer w0.25: v2(18.375,28.75) 18.375,28.32 21.245,25.45 21.955,25.45 22.5,24.905 R5.2
NetR6_1: R6.1 U5.3 U5.6 | length 5.2
  Top Layer w0.25: U5.6 16.18,40.55 16.875,41.245 16.875,41.755 17.57,42.45 U5.3 18.9,42.45 R6.1
NetR11_2: R11.2 U1.43 | length 7.3
  Top Layer w0.25: v2(39.075,30.3) U1.43
  Bottom Layer w0.25: v2(39.075,30.3) 39.218,30.442 40.912,30.442 41.317,30.037 41.317,26.517 R11.2
NetR12_2: R12.2 U1.35 | length 26.9
  Top Layer w0.25: U1.35 32.675,32.3 33.125,32.75 40.025,32.75 40.1,32.675 40.144,32.675 40.625,32.194 v2(40.625,29.75)
  Bottom Layer w0.25: v2(40.625,29.75) 40.625,28.646 40.525,28.546 40.525,15.525 R12.2
NetR13_2: R13.2 U1.36 | length 59.4
  Top Layer w0.25: v2(28.75,8.125) 18.646,8.125 8.932,17.838 8.932,21.432 12.25,24.75 22.106,24.75 27.049,29.693 32.593,29.693 33.475,30.575 U1.36
  Bottom Layer w0.25: v2(28.75,8.125) 30.075,6.8 R13.2
NetR17_1: R17.1 U1.27 U8.1 | length 34.9
  Top Layer w0.25: v2(15.75,28.625) 15.75,27.251 17.626,25.375 22.024,25.375 25.5,28.851 v2(25.5,30.125) ; U1.27 30.769,38.05 31.557,37.262 31.557,37.068 32.25,36.375 v2(32.25,36.125)
  Bottom Layer w0.25: U8.1 10.3,29.1 R17.1 11.275,30.075 12.825,30.075 14.275,28.625 v2(15.75,28.625) ; v2(25.5,30.125) 31.5,36.125 v2(32.25,36.125)
NetR18_2: R18.2 U7.1 | length 1.8
  Bottom Layer w0.25: R18.2 14.775,40.575 U7.1
NetU1_15: U1.15 U3.3 | length 25.6
  Top Layer w0.25: v2(37.375,41.25) 37.375,42.85 U1.15
  Bottom Layer w0.25: U3.3 26.425,29.25 31.231,29.25 31.799,29.818 32.616,29.818 34.5,31.702 34.5,35.664 37.375,38.54 v2(37.375,41.25)
NetU1_19: U1.19 U4.2 | length 17.5
  Top Layer w0.25: U4.2 29.544,31.225 34.568,36.248 34.568,41.557 34.275,41.85 U1.19
NetU1_25: U1.25 U5.1 | length 16.9
  Top Layer w0.25: U5.1 19.575,40.55 20.5,39.625 v2(21.375,39.625) ; v2(25.125,43.5) 25.509,43.5 26.575,42.434 26.575,42.114 29.089,39.6 30.125,39.6 U1.25
  Bottom Layer w0.25: v2(21.375,39.625) 21.375,41.13 23.745,43.5 v2(25.125,43.5)
NetU1_26: U1.26 U7.7 | length 22.7
  Top Layer w0.25: v2(21.875,34) 22.3,34.425 27.075,34.425 v2(27.375,34.125) ; U1.26@30.2,38.875 U1.26 31.525,38.85 32.25,38.125 v2(32.25,37.375)
  Bottom Layer w0.25: U7.7 16.8,37.05 17.125,37.375 18.5,37.375 v2(21.875,34) ; v2(27.375,34.125) 30.625,37.375 v2(32.25,37.375)
NetU1_30: U1.30 U2.7 | length 10.7
  Top Layer w0.25: U2.7 20.905,34.75 21.646,34.75 21.821,34.925 27.282,34.925 27.39,34.817 28.183,34.817 28.188,34.813 29.025,35.65 U1.30
VBAT: C9.2 C19.2 C23.2 D1.2 R6.2 R18.1 U3.1 U5.2 U6.1 U6.3 U7.3 | length 42
  Top Layer w0.25: U5.2 R6.2@19.55,41.5
  Top Layer w0.5: R6.2@19.55,41.5 R6.2 19.65,41.55 C19.2 ; v3(22.875,40) 22.75,40 22.125,40.625 C19.2 ; U6.3 23.525,41.55 C19.2 ; U6.1 25.95,42.175 25.625,42.5 23,42.5 22.125,41.625 C19.2
  Bottom Layer w0.4: U7.3 17.45,39.375 18.125,38.7
  Bottom Layer w0.5: R18.1 18.125,38.7 19.975,38.7 C23.2 22.05,38.675 22.875,39.5 v3(22.875,40) 26.125,36.75 26.125,35.532 24.225,33.632 24.225,31.35 21.55,28.675 C9.2 ; U3.1 21.7,26.425 C9.2@21.7,28.375
pads on no net: J1.2 J1.3 J1.4 J1.MH J2. J3.6 OLED1.7 OLED1.MH S5.1 S5.4 U1.12 U1.13 U1.33 U1.34 U3.4 U6.4

## Polygon pours and split planes (outlines as drawn)
GND on Top Layer "Top Layer-GND" (solid, remove dead copper, pour order 3): 0,0 0,50 45,50 45,0
GND on Bottom Layer "Bottom Layer-GND" (solid, remove dead copper, pour order 6): 0,0 0,50 45,50 45,0

## Keep-outs
Keep-Out Layer:
  circle w0.45: c2.875,47.125 r1.625
  circle w0.45: c42.125,47.125 r1.625
  circle w0.45: c42.125,2.875 r1.63
  circle w0.45: c2.875,2.875 r1.668
  lines w0.45: 0,0 45,0 45,50 0,50 0,0

## Silkscreen, mask and mechanical layers (free items; w line width, h text height)
Top Overlay:
  circle w0.1: c2.875,47.125 r2.74
  circle w0.1: c42.125,47.125 r2.74
  circle w0.1: c42.125,2.875 r2.74
  circle w0.1: c2.875,2.875 r2.74
  text "HVboard" at 6.25,48.25 h1.5
  text "Interface" at 6.375,47 h1.5
  text "1" at 33.125,46.25 h1.5
  text "OFF" at 0.75,25 h1.2
  text "ON" at 6.125,25 h1.2
  text "1" at 0.65,22.625 h1.5
  text "1" at 8.25,22.625 h1.5
  text "M" at 18.375,5.25 h4.3
  text "MEDICAL PRODUCTS GROUP" at 16.125,3.75 h1
  text "Piezo Micropump Driver Control Board" at 14.375,1.75 h1
  text "MPG-PMD-PCB-1 Rev.B Nov 2015" at 15.5,0.375 h1
Bottom Overlay:
  circle w0.1: c2.875,2.875 r2.74
  circle w0.1: c42.125,2.875 r2.74
  circle w0.1: c42.125,47.125 r2.74
  circle w0.1: c2.875,47.125 r2.74
  lines w0.254: 1,6 44,6 44,31 1,31 1,6
  text "-" at 11.375,37.625 h3
  text "+" at 11,35.375 h3
Mechanical 16:
  drawing of 1874 lines, arcs and shapes, not listed
  text "1" at -84.411,135.259 h1.78
  text "3" at 61.385,135.259 h1.78
  text "4" at 134.283,135.259 h1.78
  text "2" at -11.75,135.125 h1.78
  text "A" at -118.752,112.247 h1.78
  text "A" at 168.268,112.247 h1.78
  text "B" at -118.752,64.19 h1.78
  text "B" at 168.268,64.19 h1.78
  text "C" at -118.752,15.676 h1.78
  text "ENGINEER:" at 53.333,-21.332 h1.14
  text "TITLE:" at 91.433,-21.332 h1.14
  text "PCB DESIGNER:" at 53.333,-28.825 h1.14
  text "D" at -118.752,-32.33 h1.78
  text "D" at 168.268,-32.33 h1.78
  text "DATE:" at 53.333,-36.572 h1.14
  text "PART NO.:" at 91.433,-36.572 h1.14
  text "REV:" at 144.773,-36.572 h1.14
  text "Altium Limited" at 20.313,-39.112 h1.78
  text ".PRINT_DATE" at 54.603,-39.62 h1.78
  text "12a Rodborough Rd" at 20.313,-41.652 h1.78
  text "Frenchs Forest" at 20.313,-44.192 h1.78
  text "FILE NAME:" at 53.333,-44.192 h1.14
  text "DWG NO:" at 91.433,-44.192 h1.14
  text "SCALE:" at 144.773,-44.192 h1.14
  text "NSW 2086" at 20.313,-46.732 h1.78
  text ".PCB_FILE_NAME_NO_PATH" at 54.603,-47.24 h1.78
  text "1" at -84.411,-52.701 h1.78
  text "2" at -11.767,-52.701 h1.78
  text "3" at 61.385,-52.701 h1.78
  text "4" at 134.283,-52.701 h1.78
Mechanical 32:
  circle w0.254: c2.875,2.875 r1.625
  circle w0.254: c42.125,2.875 r1.625
  circle w0.254: c42.125,47.125 r1.625
  circle w0.254: c2.875,47.125 r1.625
  lines w0.254: 0,0 0,50 45,50 45,0 0,0

## Text inside footprints (layer, text, board x,y; h text height)
J1: Mechanical 11 "1" at 8.325,39.075 h1 r270
J2: Mechanical 11 "1" at 2.38,39.701 h1 r270; Bottom Overlay "1" at 2.381,39.701 h1 r270
OLED1: Mechanical 11 "1" at 12.217,21.042 h1; Mechanical 11 "30" at 31.925,21.15 h1; Top Overlay "FOLD" at 20.325,11.45 h1.11; Top Overlay "30" at 31.825,21.05 h1.11; Top Overlay "1" at 12.025,21.15 h1.11
U1: Mechanical 11 "1" at 40.875,33.65 h1 r180
U2: Mechanical 11 "1" at 16.075,36.15 h0.5 r90
U7: Mechanical 11 "1" at 16.025,40.775 h0.8 r180